# Altium PCB PCB1.PcbDoc
Units mm, origin at the board's own origin, x right, y up, seen from the top; angles counter-clockwise.
Board outline 55.37 x 70.1 mm, 2 copper layers (Top Layer, Bottom Layer); 201 components, 102 nets, 606 pads, 206 vias.
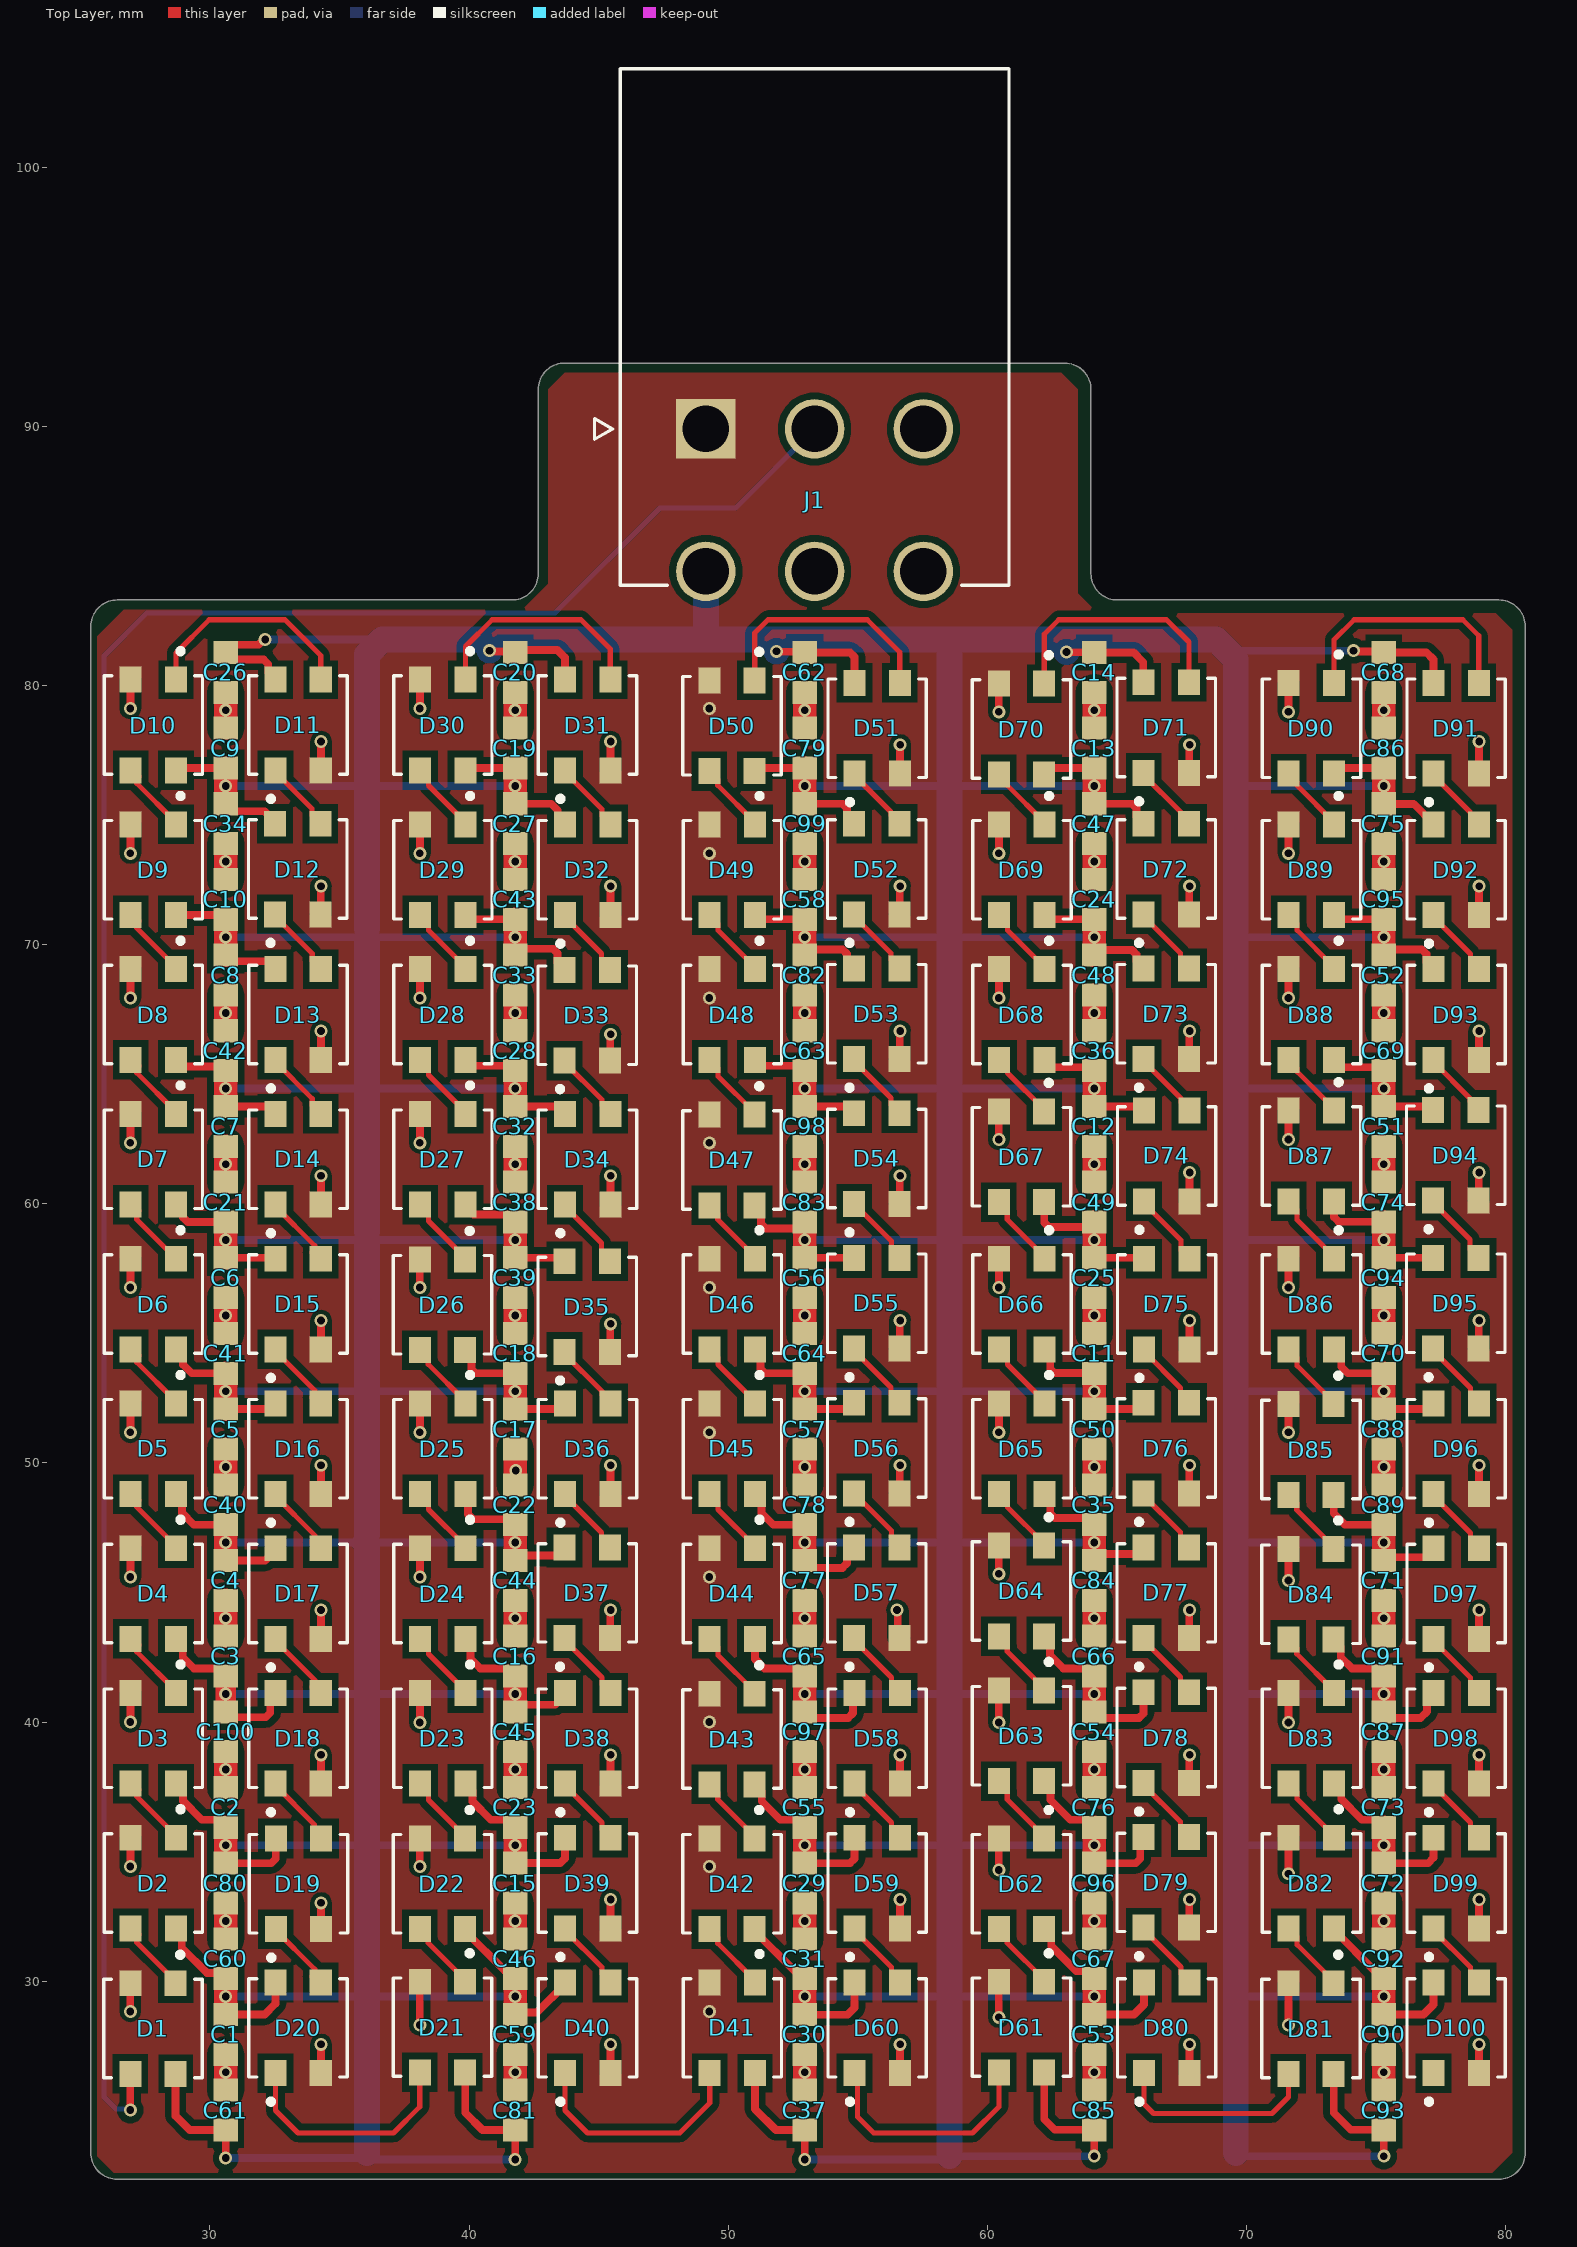
[diagram p0: Top Layer view]
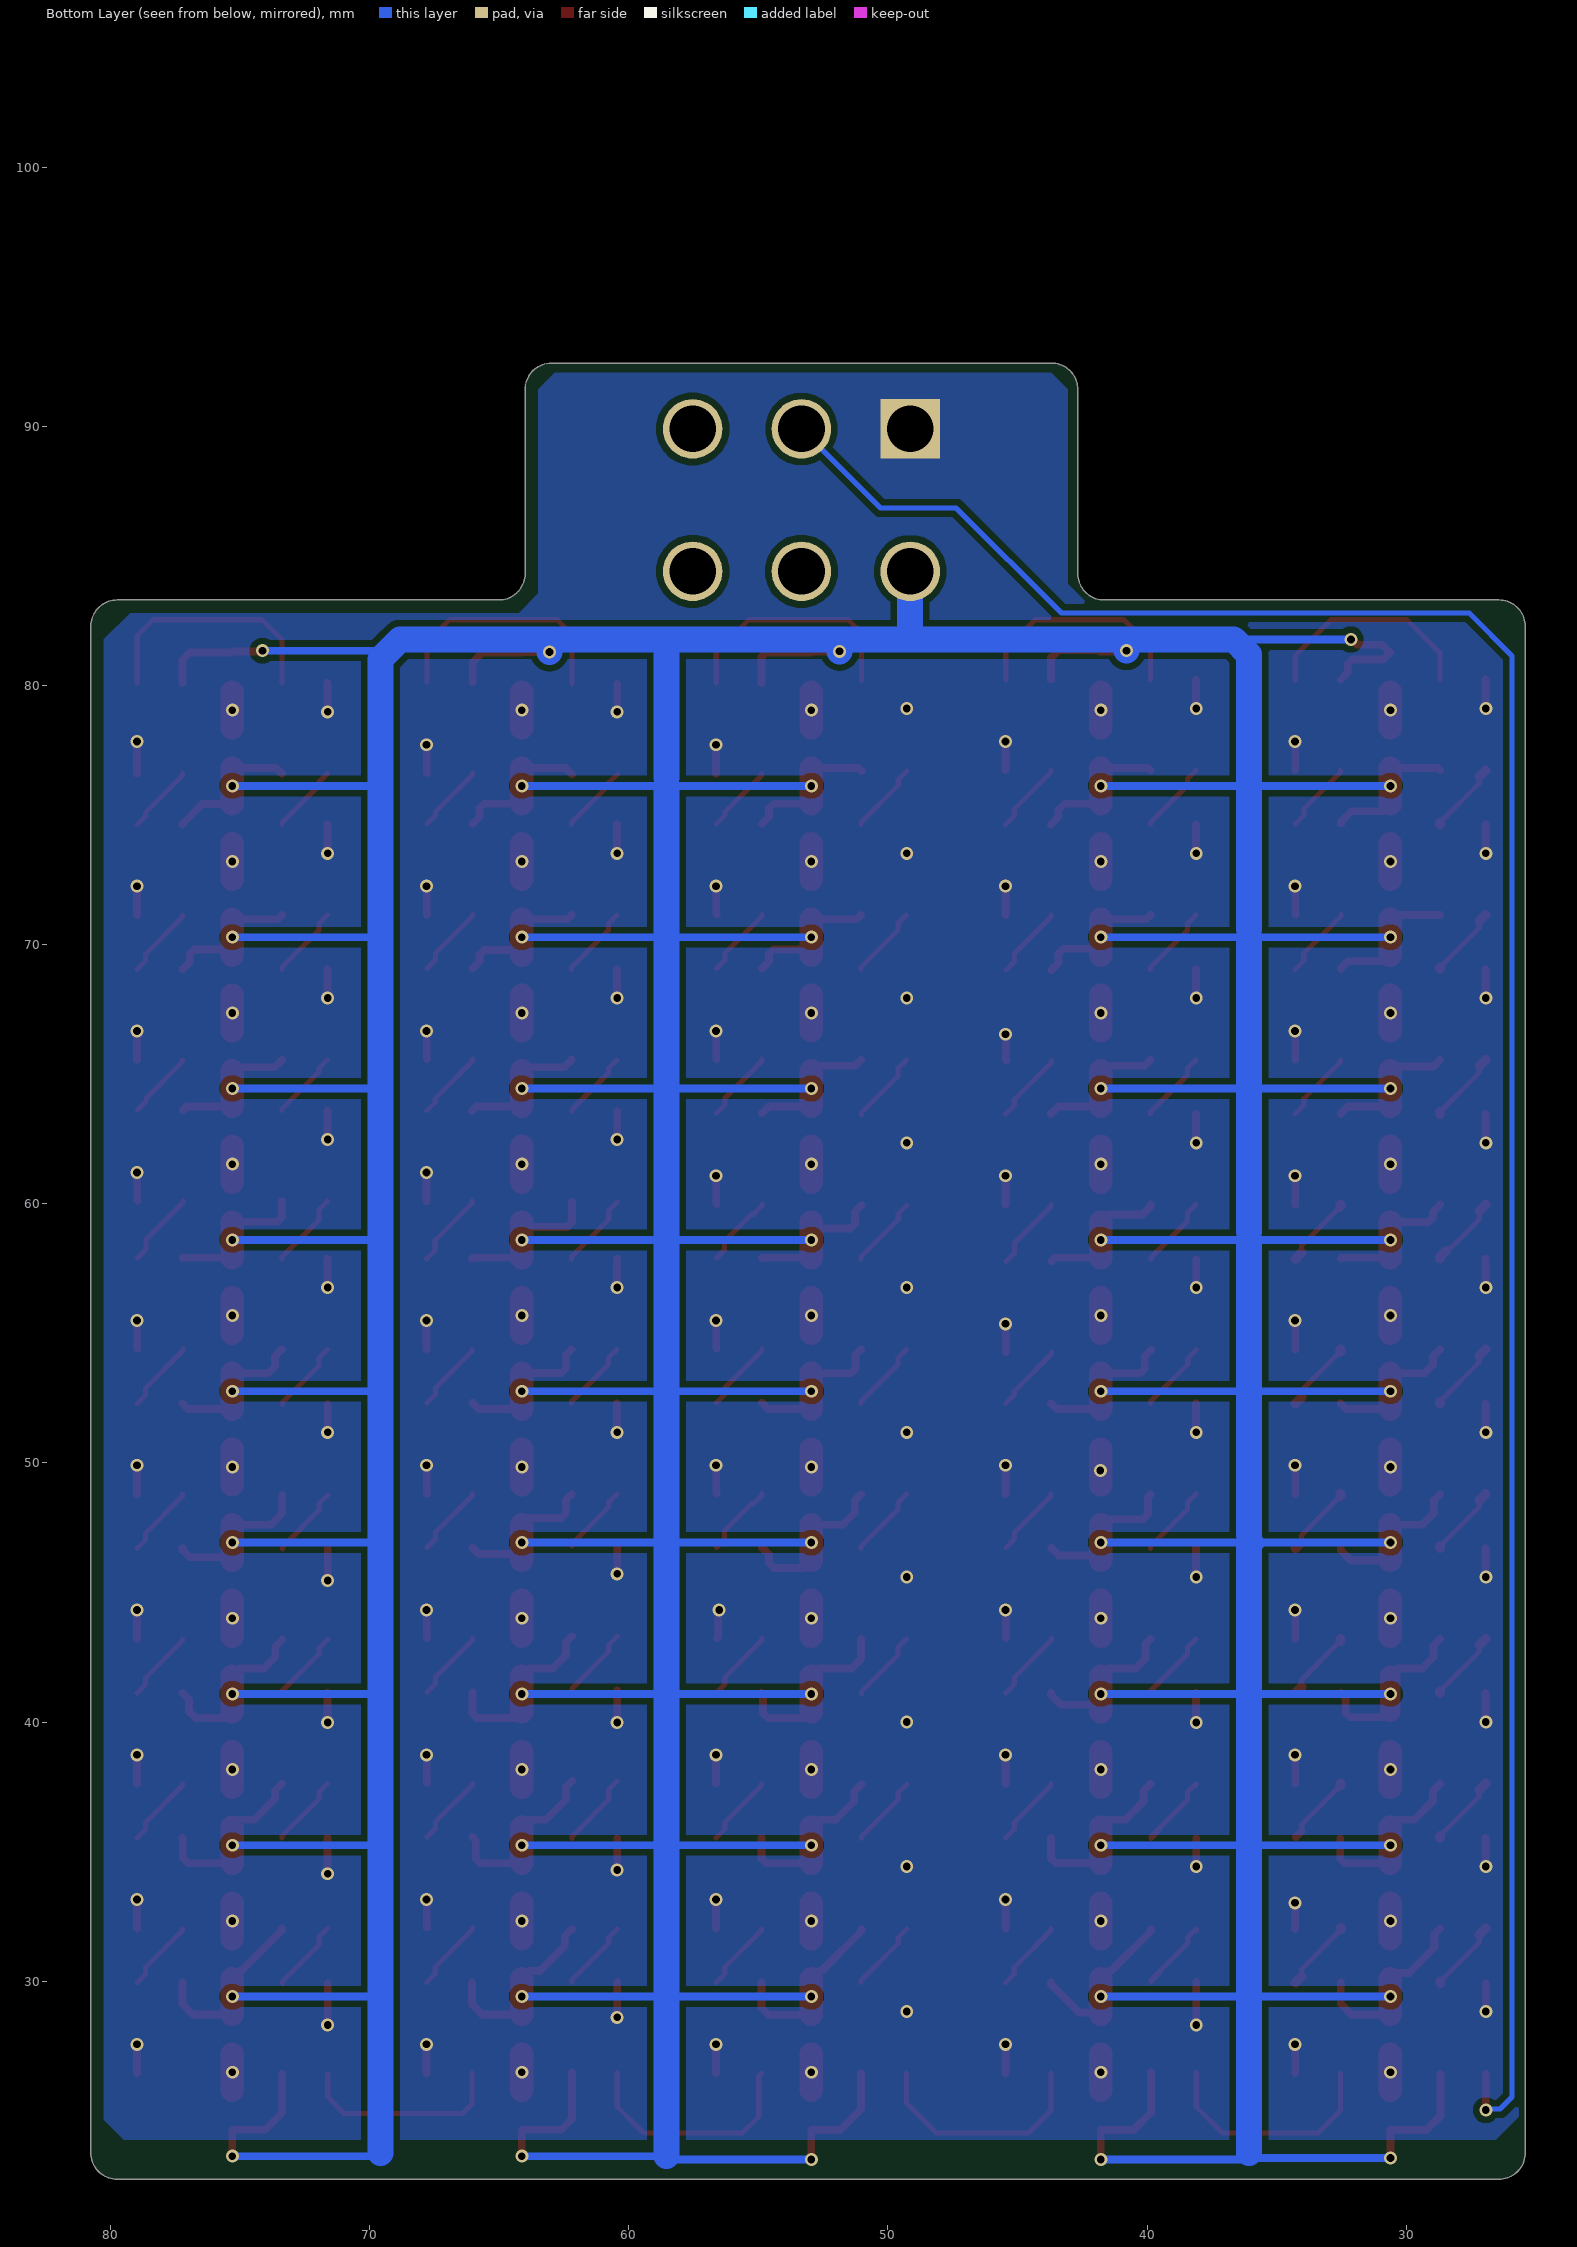
[diagram p1: Bottom Layer view, seen from below]
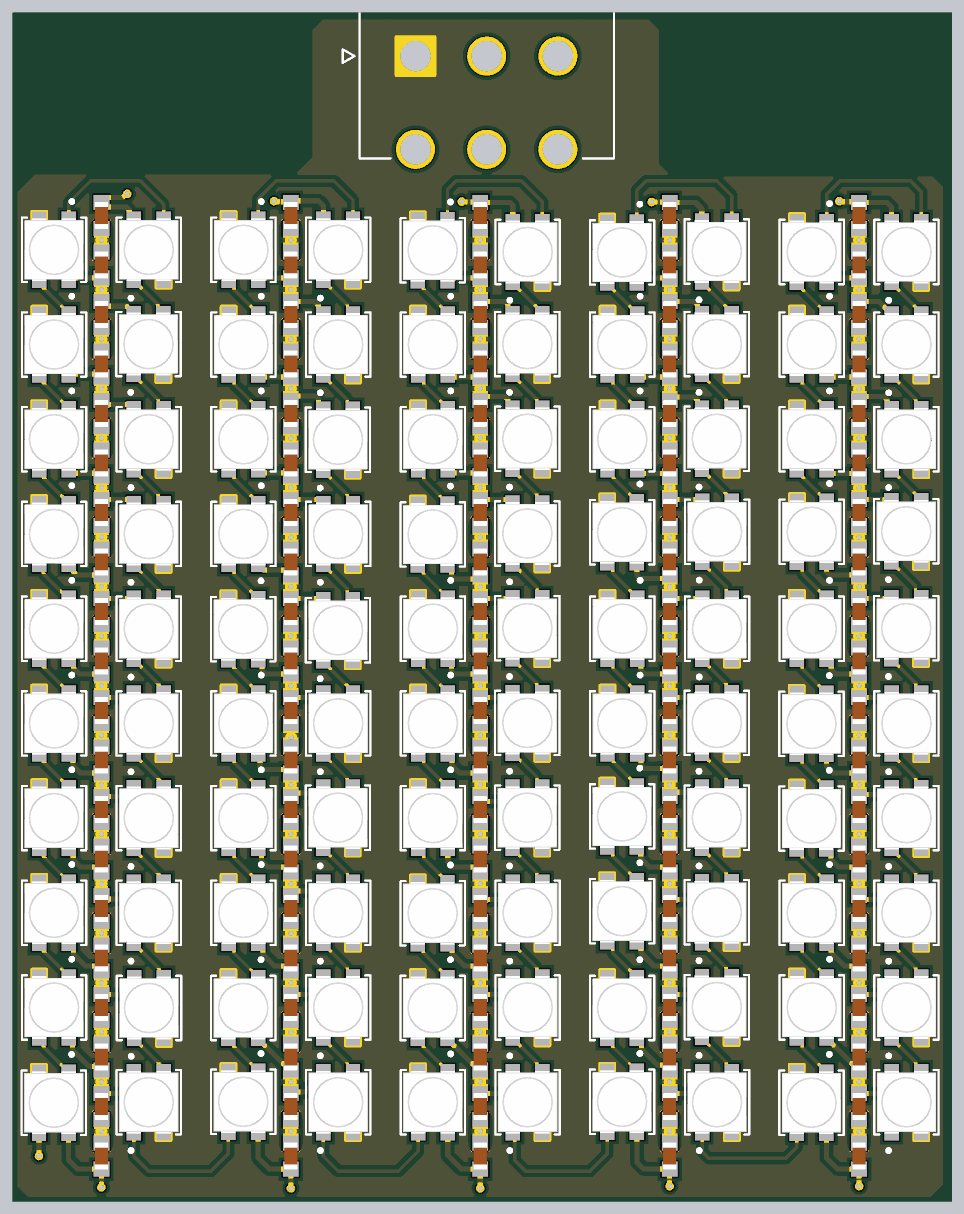
[diagram p2: 3D render of the assembled board from above, using the file's embedded part models]

## Layer stack, top to bottom
Top Solder: solder mask 0.0102, Solder Resist, Dk 3.5
Top Layer: signal copper 0.0356
Dielectric 1: dielectric 0.32, FR-4, Dk 4.8
Bottom Layer: signal copper 0.0356
Bottom Solder: solder mask 0.0102, Solder Resist, Dk 3.5

## Board outline
79.756,83.312 65.024,83.312 cw(c65.024,84.328) 64.008,84.328 64.008,91.44 ccw(c62.992,91.44) 62.992,92.456 43.688,92.456 ccw(c43.688,91.44) 42.672,91.44 42.672,84.328 cw(c41.656,84.328) 41.656,83.312 26.416,83.312 ccw(c26.416,82.296) 25.4,82.296 25.4,23.368 ccw(c26.416,23.368) 26.416,22.352 79.756,22.352 ccw(c79.756,23.368) 80.772,23.368 80.772,82.296 ccw(c79.756,82.296)

## Design rules (kind name [scope] priority, off if disabled: settings)
Clearance [All] p1: gap=0.254 ignorepadtopadclearanceinfootprint=TRUE except(0.127: SMDPad-SMDPad; 0.2: Arc-THPad Track-THPad; 0.5: Arc-Hole Track-Hole)
PolygonConnect [All] p1: connectstyle=Direct reliefconductorwidth=0.254 reliefentries=4 polygonreliefangle="90 Angle" airgapwidth=0.254
RoutingVias [All] p1: holewidth=0.711 width=1.27 viastyle="Through Hole" minholewidth=0.3 minwidth=0.25 maxholewidth=0.711 maxwidth=1.27
SolderMaskExpansion [All] p1: expansion=0.102 istentingtop=FALSE
UnRoutedNet [All] p1: checkbadconnections=TRUE
Width [All] p1: maxlimit=1 minlimit=0.127 preferedwidth=0.2
29 further rules are at their usual default settings.

## Components (designator, comment, footprint, x,y, rotation, side; value= is the part's Value field where it differs from the comment)
C1 "CL10B104KB8NNNC" CAPC1608X90N 30.607,27.94 r270 top
C2 "CL10B104KB8NNNC" CAPC1608X90N 30.607,36.703 r90 top
C3 "CL10B104KB8NNNC" CAPC1608X90N 30.607,42.545 r90 top
C4 "CL10B104KB8NNNC" CAPC1608X90N 30.607,45.466 r270 top
C5 "CL10B104KB8NNNC" CAPC1608X90N 30.607,51.308 r270 top
C6 "CL10B104KB8NNNC" CAPC1608X90N 30.607,57.15 r270 top
C7 "CL10B104KB8NNNC" CAPC1608X90N 30.607,62.992 r270 top
C8 "CL10B104KB8NNNC" CAPC1608X90N 30.607,68.834 r270 top
C9 "CL10B104KB8NNNC" CAPC1608X90N 30.607,77.597 r90 top
C10 "CL10B104KB8NNNC" CAPC1608X90N 30.607,71.755 r90 top
C11 "CL10B104KB8NNNC" CAPC1608X90N 64.135,54.229 r90 top
C12 "CL10B104KB8NNNC" CAPC1608X90N 64.135,62.992 r270 top
C13 "CL10B104KB8NNNC" CAPC1608X90N 64.135,77.597 r90 top
C14 "CL10B104KB8NNNC" CAPC1608X90N 64.135,80.518 r270 top
C15 "CL10B104KB8NNNC" CAPC1608X90N 41.783,33.782 r270 top
C16 "CL10B104KB8NNNC" CAPC1608X90N 41.783,42.545 r90 top
C17 "CL10B104KB8NNNC" CAPC1608X90N 41.783,51.308 r270 top
C18 "CL10B104KB8NNNC" CAPC1608X90N 41.783,54.229 r90 top
C19 "CL10B104KB8NNNC" CAPC1608X90N 41.783,77.597 r90 top
C20 "CL10B104KB8NNNC" CAPC1608X90N 41.783,80.518 r270 top
C21 "CL10B104KB8NNNC" CAPC1608X90N 30.607,60.071 r90 top
C22 "CL10B104KB8NNNC" CAPC1608X90N 41.783,48.387 r90 top
C23 "CL10B104KB8NNNC" CAPC1608X90N 41.783,36.703 r90 top
C24 "CL10B104KB8NNNC" CAPC1608X90N 64.135,71.755 r90 top
C25 "CL10B104KB8NNNC" CAPC1608X90N 64.135,57.15 r270 top
C26 "CL10B104KB8NNNC" CAPC1608X90N 30.607,80.518 r270 top
C27 "CL10B104KB8NNNC" CAPC1608X90N 41.783,74.676 r270 top
C28 "CL10B104KB8NNNC" CAPC1608X90N 41.783,65.913 r90 top
C29 "CL10B104KB8NNNC" CAPC1608X90N 52.959,33.782 r270 top
C30 "CL10B104KB8NNNC" CAPC1608X90N 52.959,27.94 r270 top
C31 "CL10B104KB8NNNC" CAPC1608X90N 52.959,30.861 r90 top
C32 "CL10B104KB8NNNC" CAPC1608X90N 41.783,62.992 r270 top
C33 "CL10B104KB8NNNC" CAPC1608X90N 41.783,68.834 r270 top
C34 "CL10B104KB8NNNC" CAPC1608X90N 30.607,74.676 r270 top
C35 "CL10B104KB8NNNC" CAPC1608X90N 64.135,48.387 r90 top
C36 "CL10B104KB8NNNC" CAPC1608X90N 64.135,65.913 r90 top
C37 "CL10B104KB8NNNC" CAPC1608X90N 52.959,25.019 r90 top
C38 "CL10B104KB8NNNC" CAPC1608X90N 41.783,60.071 r90 top
C39 "CL10B104KB8NNNC" CAPC1608X90N 41.783,57.15 r270 top
C40 "CL10B104KB8NNNC" CAPC1608X90N 30.607,48.387 r90 top
C41 "CL10B104KB8NNNC" CAPC1608X90N 30.607,54.229 r90 top
C42 "CL10B104KB8NNNC" CAPC1608X90N 30.607,65.913 r90 top
C43 "CL10B104KB8NNNC" CAPC1608X90N 41.783,71.755 r90 top
C44 "CL10B104KB8NNNC" CAPC1608X90N 41.783,45.466 r270 top
C45 "CL10B104KB8NNNC" CAPC1608X90N 41.783,39.624 r270 top
C46 "CL10B104KB8NNNC" CAPC1608X90N 41.783,30.861 r90 top
C47 "CL10B104KB8NNNC" CAPC1608X90N 64.135,74.676 r270 top
C48 "CL10B104KB8NNNC" CAPC1608X90N 64.135,68.834 r270 top
C49 "CL10B104KB8NNNC" CAPC1608X90N 64.135,60.071 r90 top
C50 "CL10B104KB8NNNC" CAPC1608X90N 64.135,51.308 r270 top
C51 "CL10B104KB8NNNC" CAPC1608X90N 75.311,62.992 r270 top
C52 "CL10B104KB8NNNC" CAPC1608X90N 75.311,68.834 r270 top
C53 "CL10B104KB8NNNC" CAPC1608X90N 64.135,27.94 r270 top
C54 "CL10B104KB8NNNC" CAPC1608X90N 64.135,39.624 r270 top
C55 "CL10B104KB8NNNC" CAPC1608X90N 52.959,36.703 r90 top
C56 "CL10B104KB8NNNC" CAPC1608X90N 52.959,57.15 r270 top
C57 "CL10B104KB8NNNC" CAPC1608X90N 52.959,51.308 r270 top
C58 "CL10B104KB8NNNC" CAPC1608X90N 52.959,71.755 r90 top
C59 "CL10B104KB8NNNC" CAPC1608X90N 41.783,27.94 r270 top
C60 "CL10B104KB8NNNC" CAPC1608X90N 30.607,30.861 r90 top
C61 "CL10B104KB8NNNC" CAPC1608X90N 30.607,25.019 r90 top
C62 "CL10B104KB8NNNC" CAPC1608X90N 52.959,80.518 r270 top
C63 "CL10B104KB8NNNC" CAPC1608X90N 52.959,65.913 r90 top
C64 "CL10B104KB8NNNC" CAPC1608X90N 52.959,54.229 r90 top
C65 "CL10B104KB8NNNC" CAPC1608X90N 52.959,42.545 r90 top
C66 "CL10B104KB8NNNC" CAPC1608X90N 64.135,42.545 r90 top
C67 "CL10B104KB8NNNC" CAPC1608X90N 64.135,30.861 r90 top
C68 "CL10B104KB8NNNC" CAPC1608X90N 75.311,80.518 r270 top
C69 "CL10B104KB8NNNC" CAPC1608X90N 75.311,65.913 r90 top
C70 "CL10B104KB8NNNC" CAPC1608X90N 75.311,54.229 r90 top
C71 "CL10B104KB8NNNC" CAPC1608X90N 75.311,45.466 r270 top
C72 "CL10B104KB8NNNC" CAPC1608X90N 75.311,33.782 r270 top
C73 "CL10B104KB8NNNC" CAPC1608X90N 75.311,36.703 r90 top
C74 "CL10B104KB8NNNC" CAPC1608X90N 75.311,60.071 r90 top
C75 "CL10B104KB8NNNC" CAPC1608X90N 75.311,74.676 r270 top
C76 "CL10B104KB8NNNC" CAPC1608X90N 64.135,36.703 r90 top
C77 "CL10B104KB8NNNC" CAPC1608X90N 52.959,45.466 r270 top
C78 "CL10B104KB8NNNC" CAPC1608X90N 52.959,48.387 r90 top
C79 "CL10B104KB8NNNC" CAPC1608X90N 52.959,77.597 r90 top
C80 "CL10B104KB8NNNC" CAPC1608X90N 30.607,33.782 r270 top
C81 "CL10B104KB8NNNC" CAPC1608X90N 41.783,25.019 r90 top
C82 "CL10B104KB8NNNC" CAPC1608X90N 52.959,68.834 r270 top
C83 "CL10B104KB8NNNC" CAPC1608X90N 52.959,60.071 r90 top
C84 "CL10B104KB8NNNC" CAPC1608X90N 64.135,45.466 r270 top
C85 "CL10B104KB8NNNC" CAPC1608X90N 64.135,25.019 r90 top
C86 "CL10B104KB8NNNC" CAPC1608X90N 75.311,77.597 r90 top
C87 "CL10B104KB8NNNC" CAPC1608X90N 75.311,39.624 r270 top
C88 "CL10B104KB8NNNC" CAPC1608X90N 75.311,51.308 r270 top
C89 "CL10B104KB8NNNC" CAPC1608X90N 75.311,48.387 r90 top
C90 "CL10B104KB8NNNC" CAPC1608X90N 75.311,27.94 r270 top
C91 "CL10B104KB8NNNC" CAPC1608X90N 75.311,42.545 r90 top
C92 "CL10B104KB8NNNC" CAPC1608X90N 75.311,30.861 r90 top
C93 "CL10B104KB8NNNC" CAPC1608X90N 75.311,25.019 r90 top
C94 "CL10B104KB8NNNC" CAPC1608X90N 75.311,57.15 r270 top
C95 "CL10B104KB8NNNC" CAPC1608X90N 75.311,71.755 r90 top
C96 "CL10B104KB8NNNC" CAPC1608X90N 64.135,33.782 r270 top
C97 "CL10B104KB8NNNC" CAPC1608X90N 52.959,39.624 r270 top
C98 "CL10B104KB8NNNC" CAPC1608X90N 52.959,62.992 r270 top
C99 "CL10B104KB8NNNC" CAPC1608X90N 52.959,74.676 r270 top
C100 "CL10B104KB8NNNC" CAPC1608X90N 30.607,39.624 r270 top
D1 "2659" 2659 27.799,28.166 r270 top
D2 "2659" 2659 27.813,33.782 r270 top
D3 "2659" 2659 27.813,39.37 r270 top
D4 "2659" 2659 27.813,44.958 r270 top
D5 "2659" 2659 27.813,50.546 r270 top
D6 "2659" 2659 27.813,56.134 r270 top
D7 "2659" 2659 27.813,61.722 r270 top
D8 "2659" 2659 27.813,67.31 r270 top
D9 "2659" 2659 27.813,72.898 r270 top
D10 "2659" 2659 27.813,78.486 r270 top
D11 "2659" 2659 33.401,78.486 r90 top
D12 "2659" 2659 33.387,72.926 r90 top
D13 "2659" 2659 33.401,67.31 r90 top
D14 "2659" 2659 33.401,61.722 r90 top
D15 "2659" 2659 33.401,56.134 r90 top
D16 "2659" 2659 33.401,50.546 r90 top
D17 "2659" 2659 33.401,44.958 r90 top
D18 "2659" 2659 33.401,39.37 r90 top
D19 "2659" 2659 33.415,33.754 r90 top
D20 "2659" 2659 33.401,28.194 r90 top
D21 "2659" 2659 38.975,28.222 r270 top
D22 "2659" 2659 38.975,33.754 r270 top
D23 "2659" 2659 38.989,39.37 r270 top
D24 "2659" 2659 38.989,44.958 r270 top
D25 "2659" 2659 38.989,50.546 r270 top
D26 "2659" 2659 38.975,56.106 r270 top
D27 "2659" 2659 38.989,61.722 r270 top
D28 "2659" 2659 38.989,67.31 r270 top
D29 "2659" 2659 38.989,72.898 r270 top
D30 "2659" 2659 38.989,78.486 r270 top
D31 "2659" 2659 44.577,78.486 r90 top
D32 "2659" 2659 44.577,72.898 r90 top
D33 "2659" 2659 44.563,67.282 r90 top
D34 "2659" 2659 44.577,61.722 r90 top
D35 "2659" 2659 44.563,56.035 r90 top
D36 "2659" 2659 44.577,50.546 r90 top
D37 "2659" 2659 44.563,44.986 r90 top
D38 "2659" 2659 44.577,39.37 r90 top
D39 "2659" 2659 44.577,33.782 r90 top
D40 "2659" 2659 44.577,28.194 r90 top
D41 "2659" 2659 50.165,28.194 r270 top
D42 "2659" 2659 50.151,33.754 r270 top
D43 "2659" 2659 50.151,39.342 r270 top
D44 "2659" 2659 50.165,44.958 r270 top
D45 "2659" 2659 50.165,50.546 r270 top
D46 "2659" 2659 50.165,56.134 r270 top
D47 "2659" 2659 50.151,61.694 r270 top
D48 "2659" 2659 50.165,67.31 r270 top
D49 "2659" 2659 50.165,72.898 r270 top
D50 "2659" 2659 50.151,78.458 r270 top
D51 "2659" 2659 55.753,78.359 r90 top
D52 "2659" 2659 55.739,72.926 r90 top
D53 "2659" 2659 55.739,67.338 r90 top
D54 "2659" 2659 55.739,61.75 r90 top
D55 "2659" 2659 55.739,56.162 r90 top
D56 "2659" 2659 55.739,50.574 r90 top
D57 "2659" 2659 55.739,44.986 r90 top
D58 "2659" 2659 55.753,39.37 r90 top
D59 "2659" 2659 55.753,33.782 r90 top
D60 "2659" 2659 55.753,28.194 r90 top
D61 "2659" 2659 61.327,28.222 r270 top
D62 "2659" 2659 61.327,33.754 r270 top
D63 "2659" 2659 61.327,39.469 r270 top
D64 "2659" 2659 61.327,45.057 r270 top
D65 "2659" 2659 61.341,50.546 r270 top
D66 "2659" 2659 61.341,56.134 r270 top
D67 "2659" 2659 61.327,61.821 r270 top
D68 "2659" 2659 61.341,67.31 r270 top
D69 "2659" 2659 61.341,72.898 r270 top
D70 "2659" 2659 61.327,78.331 r270 top
D71 "2659" 2659 66.915,78.387 r90 top
D72 "2659" 2659 66.915,72.926 r90 top
D73 "2659" 2659 66.915,67.338 r90 top
D74 "2659" 2659 66.929,61.849 r90 top
D75 "2659" 2659 66.929,56.134 r90 top
D76 "2659" 2659 66.915,50.574 r90 top
D77 "2659" 2659 66.915,44.986 r90 top
D78 "2659" 2659 66.915,39.398 r90 top
D79 "2659" 2659 66.915,33.81 r90 top
D80 "2659" 2659 66.929,28.194 r90 top
D81 "2659" 2659 72.503,28.166 r270 top
D82 "2659" 2659 72.517,33.782 r270 top
D83 "2659" 2659 72.517,39.37 r270 top
D84 "2659" 2659 72.503,44.93 r270 top
D85 "2659" 2659 72.503,50.518 r270 top
D86 "2659" 2659 72.517,56.134 r270 top
D87 "2659" 2659 72.517,61.849 r270 top
D88 "2659" 2659 72.517,67.31 r270 top
D89 "2659" 2659 72.517,72.898 r270 top
D90 "2659" 2659 72.517,78.359 r270 top
D91 "2659" 2659 78.105,78.359 r90 top
D92 "2659" 2659 78.105,72.898 r90 top
D93 "2659" 2659 78.105,67.31 r90 top
D94 "2659" 2659 78.091,61.877 r90 top
D95 "2659" 2659 78.091,56.162 r90 top
D96 "2659" 2659 78.105,50.546 r90 top
D97 "2659" 2659 78.105,44.958 r90 top
D98 "2659" 2659 78.105,39.37 r90 top
D99 "2659" 2659 78.105,33.782 r90 top
D100 "2659" 2659 78.105,28.194 r90 top
J1 "874270602" MOLEX_874270602 49.14,89.916 r180 top

## Footprints (in the part's own frame and the unit in brackets; to place one, negate y for a bottom-side part, rotate by r counter-clockwise, add the part's x,y. Pads: shape width x height; smd on the part's side, far side on the other; paste and mask are expansions set on the pad)
2659 [mm]
  rect 1x0.85 smd: 1(-1.75,0.875) 2(-1.75,-0.875) 3(1.75,-0.875) 4(1.75,0.875)
  silkscreen extent -2.95,-1.9 1.9,1.9, body extent -1.85,-1.75 1.85,1.75, height 1.1
CAPC1608X90N [mm]
  rect 0.89x0.93 smd: 1(-0.77,0) 2(0.77,0)
  body extent -0.8,-0.4 0.8,0.4, height 0.45
MOLEX_874270602 [mm]
  rect 2.3x2.3 / inner round 2.3 / far side rect 2.3x2.3 hole 1.8 mask+0.076: 1(0,0)
  round 2.3 hole 1.8 mask+0.076: 2(-4.2,0) 3(-8.4,0) 4(0,5.5) 5(-4.2,5.5) 6(-8.4,5.5)
  silkscreen extent -11.7,-13.9 4.3,6.04

## Part data
C1 C2 C3 C4 C5 C6 C7 C8 C9 C10 C11 C12 C13 C14 C15 C16 C17 C18 C19 C20 C21 C22 C23 C24 C25 C26 C27 C28 C29 C30 C31 C32 C33 C34 C35 C36 C37 C38 C39 C40 C41 C42 C43 C44 C45 C46 C47 C48 C49 C50 C51 C52 C53 C54 C55 C56 C57 C58 C59 C60 C61 C62 C63 C64 C65 C66 C67 C68 C69 C70 C71 C72 C73 C74 C75 C76 C77 C78 C79 C80 C81 C82 C83 C84 C85 C86 C87 C88 C89 C90 C91 C92 C93 C94 C95 C96 C97 C98 C99 C100: Package=None, Availability=Unavailable, MF="{'manufacturer': u'Samsung Electro-Mechanics'}", MP=CL10B104KB8NNNC, Price=None
D1 D2 D3 D4 D5 D6 D7 D8 D9 D10 D11 D12 D13 D14 D15 D16 D17 D18 D19 D20 D21 D22 D23 D24 D25 D26 D27 D28 D29 D30 D31 D32 D33 D34 D35 D36 D37 D38 D39 D40 D41 D42 D43 D44 D45 D46 D47 D48 D49 D50 D51 D52 D53 D54 D55 D56 D57 D58 D59 D60 D61 D62 D63 D64 D65 D66 D67 D68 D69 D70 D71 D72 D73 D74 D75 D76 D77 D78 D79 D80 D81 D82 D83 D84 D85 D86 D87 D88 D89 D90 D91 D92 D93 D94 D95 D96 D97 D98 D99 D100: library part CMP-011-000000-2, "20 AWG Hook-Up Wire 26/34 White 300V 40.00' _12.19m_", Package="TQFP-32 Adafruit Industries", Component Type=Standard, Design Item ID=2659, Digi-Key_Part_Number=2183-2659-ND, Digi-Key_Purchase_URL=https://www.digikey.com/product-detail/en/pololu-corporation/2659/2183-2659-ND/10451102?utm_source=snapeda&utm_medium=aggregator&utm_campaign=symbol, MF="Adafruit Industries", MP=2659, Pin Count=4, SnapEDA_Link=https://www.snapeda.com/parts/2659/Adafruit%20Industries%20LLC/view-part/548522/?ref=snap, Source=SnapEDAsch.SchLib
J1: library part CMP-002-00072-1, Case/Package=None, Availability=Unavailable, Component Type=Standard, Design Item ID=874270602, MP=874270602, Pins=6, Price=None, Source=874270602.SchLib

## Via types
v1: diameter 0.5, hole 0.3, Top Layer to Bottom Layer, 206 vias

## Nets (pads, with @x,y where several pads share a name; then routed paths per layer and width w, separated by ;. In a path a pad name is that pad's centre, name@x,y a point inside that pad or via, vN(x,y) a via of type N, cw(c..) or ccw(c..) an arc to the next point about the centre after c; other vN are vias at no path point)
+5: C1.1 C2.1 C3.1 C4.1 C5.1 C6.1 C7.1 C8.1 C9.1 C10.1 C11.1 C12.1 C13.1 C14.1 C15.1 C16.1 C17.1 C18.1 C19.1 C20.1 C21.1 C22.1 C23.1 C24.1 C25.1 C26.1 C27.1 C28.1 C29.1 C30.1 C31.1 C32.1 C33.1 C34.1 C35.1 C36.1 C37.1 C38.1 C39.1 C40.1 C41.1 C42.1 C43.1 C44.1 C45.1 C46.1 C47.1 C48.1 C49.1 C50.1 C51.1 C52.1 C53.1 C54.1 C55.1 C56.1 C57.1 C58.1 C59.1 C60.1 C61.1 C62.1 C63.1 C64.1 C65.1 C66.1 C67.1 C68.1 C69.1 C70.1 C71.1 C72.1 C73.1 C74.1 C75.1 C76.1 C77.1 C78.1 C79.1 C80.1 C81.1 C82.1 C83.1 C84.1 C85.1 C86.1 C87.1 C88.1 C89.1 C90.1 C91.1 C92.1 C93.1 C94.1 C95.1 C96.1 C97.1 C98.1 C99.1 C100.1 D1.4 D2.4 D3.4 D4.4 D5.4 D6.4 D7.4 D8.4 D9.4 D10.4 D11.4 D12.4 D13.4 D14.4 D15.4 D16.4 D17.4 D18.4 D19.4 D20.4 D21.4 D22.4 D23.4 D24.4 D25.4 D26.4 D27.4 D28.4 D29.4 D30.4 D31.4 D32.4 D33.4 D34.4 D35.4 D36.4 D37.4 D38.4 D39.4 D40.4 D41.4 D42.4 D43.4 D44.4 D45.4 D46.4 D47.4 D48.4 D49.4 D50.4 D51.4 D52.4 D53.4 D54.4 D55.4 D56.4 D57.4 D58.4 D59.4 D60.4 D61.4 D62.4 D63.4 D64.4 D65.4 D66.4 D67.4 D68.4 D69.4 D70.4 D71.4 D72.4 D73.4 D74.4 D75.4 D76.4 D77.4 D78.4 D79.4 D80.4 D81.4 D82.4 D83.4 D84.4 D85.4 D86.4 D87.4 D88.4 D89.4 D90.4 D91.4 D92.4 D93.4 D94.4 D95.4 D96.4 D97.4 D98.4 D99.4 D100.4 J1.4 | length 826.8
  Top Layer w0.3: D1.4 28.674,24.793 29.218,24.249 C61.1 v1(30.607,23.165) ; D2.4 28.908,31.812 28.908,31.29 29.884,30.314 30.384,30.314 C60.1 ; D3.4 28.963,37.345 28.963,36.95 29.685,36.228 30.312,36.228 C2.1 ; D4.4 28.946,42.95 28.946,42.504 29.38,42.07 30.312,42.07 C3.1 ; D5.4 28.92,48.564 28.92,48.067 29.37,47.617 C40.1 ; D6.4 28.963,54.109 28.963,53.79 29.294,53.459 C41.1@30.587,53.459 ; D7.4 28.963,59.697 28.963,59.477 29.139,59.301 C21.1 ; D8.4 28.945,65.303 30.447,65.303 C42.1 ; D9.4 30.444,71.148 C10.1 ; D10.4 28.779,76.827 C9.1 ; C1.1 32.114,28.71 32.526,29.122 D20.4 ; C80.1 32.364,34.552 32.54,34.728 D19.4 ; C100.1 30.818,40.183 32.15,40.183 32.326,40.359 32.326,40.92 D18.4 ; C4.1 32.129,46.236 32.526,46.633 D17.4 ; C5.1 32.308,52.078 D16.4 ; C6.1 32.49,57.92 D15.4 ; C7.1 32.251,63.762 32.526,63.487 D14.4 ; C8.1 30.844,69.367 32.251,69.367 32.526,69.092 D13.4 ; C34.1 30.894,75.159 32.104,75.159 32.512,74.751 D12.4 ; v1(32.131,81.788) 32.077,81.788 31.874,81.585 31.098,81.585 31.096,81.583 30.922,81.583 30.627,81.288 C26.1 30.885,81.01 32.075,81.01 32.251,80.835 32.251,80.511 D11.4 ; D21.4 39.85,24.92 40.521,24.249 C81.1 v1(41.783,23.114) ; D22.4 39.85,31.929 41.393,30.386 41.488,30.386 C46.1 ; D26.4 40.09,54.116 40.09,53.635 40.266,53.459 C18.1 ; D23.4 40.134,37.35 40.134,36.929 40.836,36.228 41.488,36.228 C23.1 ; D24.4 40.058,43.014 40.058,42.441 40.429,42.07 41.488,42.07 C16.1 ; D25.4 39.964,48.696 39.964,48.022 40.157,47.828 41.572,47.828 C22.1 ; D27.4 39.864,59.897 40.173,59.588 41.496,59.588 C38.1 ; D28.4 40.095,65.329 41.597,65.329 C28.1 ; D29.4 40.027,70.985 C43.1 ; D30.4 39.955,76.827 C19.1 ; v1(40.792,81.356) 40.826,81.322 41.817,81.322 41.877,81.382 43.409,81.382 43.702,81.088 D31.4 ; C59.1 41.864,28.791 42.624,28.791 43.702,29.869 D40.4 ; C45.1 42.054,40.665 43.322,40.665 43.702,41.045 D38.4 ; C44.1 41.978,46.431 43.413,46.431 43.688,46.706 D37.4 ; C17.1 43.484,52.078 D36.4 ; C39.1 43.553,57.92 D35.4 ; C32.1 43.427,63.762 43.702,63.487 D34.4 ; C33.1 42.029,69.85 43.237,69.85 43.413,69.674 43.413,69.307 D33.4 ; C27.1 43.172,75.446 43.427,75.191 43.427,74.923 D32.4 ; C15.1@41.788,34.557 43.523,34.557 43.702,34.736 D39.4 ; D42.4 51.026,31.929 52.569,30.386 52.664,30.386 C31.1 ; D43.4 51.301,37.317 51.301,36.939 52.012,36.228 52.664,36.228 C55.1 ; D47.4 51.274,59.696 51.274,59.231 51.45,59.055 52.713,59.055 C83.1 ; D50.4 51.145,76.827 C79.1 ; D41.4 51.04,25.058 51.849,24.249 C37.1 v1(52.959,23.114) ; D44.4 51.04,42.432 51.402,42.07 52.664,42.07 C65.1 ; D45.4 51.285,48.551 51.285,48.08 51.748,47.617 C78.1 ; D46.4 51.252,54.172 51.252,53.635 51.428,53.459 C64.1 ; D48.4 51.271,65.329 52.773,65.329 C63.1 ; D49.4 51.203,70.985 C58.1 ; v1(51.867,81.331) 51.888,81.309 52.938,81.309 C62.1 54.702,81.288 54.878,81.112 D51.4 ; C30.1 52.967,28.702 54.61,28.702 54.878,28.97 D60.4 ; C29.1 52.967,34.544 54.702,34.544 54.878,34.72 D59.4 ; C97.1 53.196,40.157 54.635,40.157 54.824,40.346 54.824,41.066 D58.4 ; C77.1 53.246,45.949 54.413,45.949 54.589,46.124 54.589,46.461 D57.4 ; C57.1 54.618,52.078 D56.4 ; C56.1 54.856,57.92 D55.4 ; C98.1 54.602,63.762 D54.4 ; C82.1 53.18,69.825 54.413,69.825 54.589,69.649 54.589,69.363 D53.4 ; C99.1 54.413,75.446 54.589,75.27 54.589,74.951 D52.4 ; D61.4 62.202,24.666 62.611,24.257 64.127,24.257 C85.1 v1(64.135,23.241) ; D62.4 62.477,31.729 62.477,31.351 63.442,30.386 63.84,30.386 C67.1 ; D63.4 62.443,37.478 62.443,36.998 63.213,36.228 63.84,36.228 C76.1 ; D64.4 62.43,43.079 62.43,42.574 62.934,42.07 63.84,42.07 C66.1 ; D67.4 62.202,59.282 62.378,59.106 63.94,59.106 C49.1 ; D70.4 62.448,76.827 C13.1 ; D65.4 62.436,48.576 62.436,48.055 62.612,47.879 63.873,47.879 C35.1 ; D66.4 62.436,54.164 62.436,53.643 62.612,53.467 64.127,53.467 C11.1 ; D68.4 62.216,65.553 62.491,65.278 64,65.278 C36.1 ; D69.4 62.379,70.985 C24.1 ; v1(63.068,81.305) 63.077,81.297 64.126,81.297 C14.1 65.651,81.288 66.028,80.911 66.028,80.149 D71.4 ; C53.1 65.667,28.71 66.054,29.097 D80.4 ; C96.1 65.737,34.552 65.913,34.728 65.913,35.433 D79.4 ; C54.1 64.372,40.157 65.864,40.157 66.04,40.333 D78.4 ; C84.1 64.381,46.482 65.786,46.482 D77.4 ; C50.1 65.794,52.078 D76.4 ; C25.1 66.018,57.92 D75.4 ; C12.1 65.891,63.762 D74.4 ; C48.1 64.33,69.799 65.589,69.799 65.765,69.623 65.765,69.363 D73.4 ; C47.1 65.589,75.446 65.765,75.27 65.765,74.951 D72.4 ; D81.4 73.378,24.92 74.041,24.257 75.303,24.257 C93.1 v1(75.311,23.241) ; D84.4 73.653,42.905 73.653,42.501 74.084,42.07 75.016,42.07 C91.1 ; D85.4 73.378,48.055 73.816,47.617 C89.1 ; D82.4 73.392,31.957 74.963,30.386 75.016,30.386 C92.1 ; D83.4 73.667,37.345 73.667,37.026 74.465,36.228 75.016,36.228 C73.1 ; D86.4 73.667,54.109 73.667,53.714 73.922,53.459 C70.1 ; D87.4 73.392,59.485 73.568,59.309 75.303,59.309 C74.1 ; D88.4 73.392,65.553 73.667,65.278 75.176,65.278 C69.1 ; D89.4 73.555,70.985 C95.1 ; D90.4 73.61,76.827 C86.1 ; v1(74.143,81.356) 74.177,81.322 75.277,81.322 C68.1 76.954,81.288 77.23,81.012 D91.4 ; C90.1 76.843,28.71 77.23,29.097 D100.4 ; C72.1 77.021,34.552 77.227,34.758 77.227,35.529 D99.4 ; C87.1 75.548,40.157 76.733,40.157 76.982,40.406 76.982,40.872 D98.4 ; C71.1 75.433,46.358 76.955,46.358 77.23,46.633 D97.4 ; C88.1 77.012,52.078 D96.4 ; C94.1 77.208,57.92 D95.4 ; C51.1 77.081,63.762 D94.4 ; C52.1 75.532,69.825 76.779,69.825 76.955,69.649 76.955,69.335 D93.4 ; C75.1@75.316,75.441 76.462,75.441 77.23,74.673 D92.4
  Top Layer w0.8: C100.1 v1(30.607,41.084) C3.1
  Top Layer w0.9: C1.1 v1(30.607,29.4) C60.1 ; C80.1 v1(30.607,35.242) C2.1 ; C4.1 v1(30.607,46.926) C40.1 ; C5.1 v1(30.607,52.768) C41.1 ; C6.1 v1(30.607,58.61) C21.1 ; C7.1 v1(30.607,64.453) C42.1 ; C8.1 v1(30.607,70.294) C10.1 ; C34.1 v1(30.607,76.136) C9.1 ; C59.1 v1(41.783,29.4) C46.1 ; C23.1 v1(41.783,35.242) C15.1 C15.1@41.788,34.557 ; C45.1 v1(41.783,41.084) C16.1 ; C44.1 v1(41.783,46.926) C22.1 ; C17.1 v1(41.783,52.768) C18.1 ; C39.1 v1(41.783,58.61) C38.1 ; C32.1 v1(41.783,64.453) C28.1 ; C33.1 v1(41.783,70.294) C43.1 ; C27.1 v1(41.783,76.136) C19.1 ; C30.1 v1(52.959,29.4) C31.1 ; C29.1 v1(52.959,35.242) C55.1 ; C97.1 v1(52.959,41.084) C65.1 ; C77.1 v1(52.959,46.926) C78.1 ; C57.1 v1(52.959,52.768) C64.1 ; C56.1 v1(52.959,58.61) C83.1 ; C98.1 v1(52.959,64.453) C63.1 ; C82.1 v1(52.959,70.294) C58.1 ; C99.1 v1(52.959,76.136) C79.1 ; C53.1 v1(64.135,29.4) C67.1 ; C96.1 v1(64.135,35.242) C76.1 ; C54.1 v1(64.135,41.084) C66.1 ; C84.1 v1(64.135,46.926) C35.1 ; C50.1 v1(64.135,52.768) C11.1 ; C25.1 v1(64.135,58.61) C49.1 ; C12.1 v1(64.135,64.453) C36.1 ; C48.1 v1(64.135,70.294) C24.1 ; C47.1 v1(64.135,76.136) C13.1 ; C90.1 v1(75.311,29.4) C92.1 ; C72.1 v1(75.311,35.242) C73.1 ; C87.1 v1(75.311,41.084) C91.1 ; C71.1 v1(75.311,46.926) C89.1 ; C88.1 v1(75.311,52.768) C70.1 ; C94.1 v1(75.311,58.61) C74.1 ; C51.1 v1(75.311,64.453) C69.1 ; C52.1 v1(75.311,70.294) C95.1 ; C86.1 v1(75.311,76.136) C75.1 C75.1@75.316,75.441
  Bottom Layer w0.3: v1(30.607,23.165) 35.865,23.165 36.068,23.368 36.322,23.114 v1(41.783,23.114) ; v1(30.607,29.4) 36.005,29.4 ; v1(30.607,35.242) 35.877,35.242 ; v1(30.607,41.084) 36.005,41.084 ; v1(30.607,46.926) 35.75,46.926 ; v1(30.607,52.768) 36.005,52.768 ; v1(30.607,58.61) 36.068,58.61 v1(41.783,58.61) ; v1(30.607,64.453) 36.005,64.453 ; v1(30.607,70.294) 36.068,70.294 v1(41.783,70.294) ; v1(30.607,76.136) 36.005,76.136 ; v1(32.131,81.788) 36.654,81.788 ; 36.068,35.242 v1(41.783,35.242) ; 36.068,41.084 v1(41.783,41.084) ; 36.068,46.926 v1(41.783,46.926) ; 36.068,52.768 v1(41.783,52.768) ; 36.068,64.453 v1(41.783,64.453) ; 36.068,76.136 v1(41.783,76.136) ; 36.131,29.4 v1(41.783,29.4) ; v1(52.959,23.114) 58.42,23.114 58.547,23.241 v1(64.135,23.241) ; v1(52.959,29.4) 58.547,29.4 v1(64.135,29.4) ; v1(52.959,35.242) 58.102,35.242 ; v1(52.959,41.084) 58.229,41.084 58.547,41.402 58.864,41.084 v1(64.135,41.084) ; v1(52.959,46.926) 58.483,46.926 ; v1(52.959,52.768) 58.483,52.768 ; v1(52.959,58.61) 58.483,58.61 ; v1(52.959,64.453) 58.483,64.453 ; v1(52.959,70.294) 58.547,70.294 ; v1(52.959,76.136) 58.547,76.136 v1(64.135,76.136) ; 58.547,35.687 58.102,35.242 ; 58.61,46.926 v1(64.135,46.926) ; 58.61,52.768 v1(64.135,52.768) ; 58.61,58.61 v1(64.135,58.61) ; 58.61,64.453 v1(64.135,64.453) ; 58.737,70.294 v1(64.135,70.294) ; v1(64.135,35.242) 58.102,35.242 ; 69.215,81.407 69.266,81.356 v1(74.143,81.356) ; 69.596,23.368 69.723,23.241 v1(75.311,23.241) ; 69.596,35.052 69.787,35.242 v1(75.311,35.242) ; 69.596,41.402 69.913,41.084 v1(75.311,41.084) ; 69.596,64.77 69.913,64.453 v1(75.311,64.453) ; 69.596,70.485 69.787,70.294 v1(75.311,70.294) ; 69.659,29.4 v1(75.311,29.4) ; 69.659,46.926 v1(75.311,46.926) ; 69.659,52.768 v1(75.311,52.768) ; 69.659,58.61 v1(75.311,58.61) ; 69.659,76.136 v1(75.311,76.136)
  Bottom Layer w0.6: 35.75,46.926 36.068,46.926
  Bottom Layer w0.9: 36.005,29.4 36.068,29.464 36.131,29.4 ; 58.483,46.926 58.547,46.99 58.61,46.926 ; 58.483,52.768 58.547,52.832 58.61,52.768 ; 58.483,58.61 58.547,58.674 58.61,58.61 ; 58.483,64.453 58.547,64.516 58.61,64.453 ; 69.596,29.464 69.659,29.4 ; 69.596,46.99 69.659,46.926 ; 69.596,52.832 69.659,52.768 ; 69.596,58.674 69.659,58.61 ; 69.596,76.2 69.659,76.136
  Bottom Layer w1: 36.068,23.368 36.068,29.464 36.068,35.052 ; 36.068,35.242 36.068,41.084 ; 36.068,41.148 36.068,46.926 ; 36.068,47.244 36.068,52.768 ; 36.068,52.832 36.068,58.61 ; 36.068,58.928 36.068,64.453 ; 36.068,64.516 36.068,70.294 ; 36.068,70.612 36.068,76.136 ; 36.068,76.2 36.068,81.202 36.654,81.788 40.64,81.788 ; v1(40.792,81.356) 40.792,81.788 49.149,81.788 ; J1.4 49.149,84.407 49.149,81.788 ; 51.816,81.788 49.149,81.788 ; v1(51.867,81.331) 51.867,81.788 58.547,81.788 ; 58.547,23.241 58.547,29.4 58.547,41.402 58.547,46.99 58.547,52.832 58.547,58.674 58.547,64.516 58.547,70.104 ; 58.547,70.294 58.547,76.136 ; 58.547,76.454 58.547,81.788 ; v1(63.068,81.305) 63.068,81.712 62.992,81.788 58.547,81.788 ; 63.068,81.788 68.834,81.788 69.215,81.407 ; 69.266,81.356 69.596,81.026 69.596,76.2 69.596,70.485 69.596,64.77 69.596,58.674 69.596,52.832 69.596,46.99 69.596,41.402 69.596,35.052 69.596,29.464 69.596,23.368
GND: C1.2 C2.2 C3.2 C4.2 C5.2 C6.2 C7.2 C8.2 C9.2 C10.2 C11.2 C12.2 C13.2 C14.2 C15.2 C16.2 C17.2 C18.2 C19.2 C20.2 C21.2 C22.2 C23.2 C24.2 C25.2 C26.2 C27.2 C28.2 C29.2 C30.2 C31.2 C32.2 C33.2 C34.2 C35.2 C36.2 C37.2 C38.2 C39.2 C40.2 C41.2 C42.2 C43.2 C44.2 C45.2 C46.2 C47.2 C48.2 C49.2 C50.2 C51.2 C52.2 C53.2 C54.2 C55.2 C56.2 C57.2 C58.2 C59.2 C60.2 C61.2 C62.2 C63.2 C64.2 C65.2 C66.2 C67.2 C68.2 C69.2 C70.2 C71.2 C72.2 C73.2 C74.2 C75.2 C76.2 C77.2 C78.2 C79.2 C80.2 C81.2 C82.2 C83.2 C84.2 C85.2 C86.2 C87.2 C88.2 C89.2 C90.2 C91.2 C92.2 C93.2 C94.2 C95.2 C96.2 C97.2 C98.2 C99.2 C100.2 D1.2 D2.2 D3.2 D4.2 D5.2 D6.2 D7.2 D8.2 D9.2 D10.2 D11.2 D12.2 D13.2 D14.2 D15.2 D16.2 D17.2 D18.2 D19.2 D20.2 D21.2 D22.2 D23.2 D24.2 D25.2 D26.2 D27.2 D28.2 D29.2 D30.2 D31.2 D32.2 D33.2 D34.2 D35.2 D36.2 D37.2 D38.2 D39.2 D40.2 D41.2 D42.2 D43.2 D44.2 D45.2 D46.2 D47.2 D48.2 D49.2 D50.2 D51.2 D52.2 D53.2 D54.2 D55.2 D56.2 D57.2 D58.2 D59.2 D60.2 D61.2 D62.2 D63.2 D64.2 D65.2 D66.2 D67.2 D68.2 D69.2 D70.2 D71.2 D72.2 D73.2 D74.2 D75.2 D76.2 D77.2 D78.2 D79.2 D80.2 D81.2 D82.2 D83.2 D84.2 D85.2 D86.2 D87.2 D88.2 D89.2 D90.2 D91.2 D92.2 D93.2 D94.2 D95.2 D96.2 D97.2 D98.2 D99.2 D100.2 J1.1 | length 171.2
  Top Layer w0.3: v1(26.924,28.829) D1.2 ; v1(26.924,34.417) 26.931,34.424 26.931,35.525 D2.2 ; v1(26.924,40.005) 26.931,40.012 26.931,41.113 D3.2 ; v1(26.924,45.593) 26.931,45.6 26.931,46.701 D4.2 ; v1(26.924,51.181) 26.931,51.188 26.931,52.289 D5.2 ; v1(26.924,56.769) 26.931,56.776 26.931,57.877 D6.2 ; v1(26.924,62.357) 26.931,62.364 26.931,63.465 D7.2 ; v1(26.924,67.945) 26.931,67.952 26.931,69.053 D8.2 ; v1(26.924,73.533) 26.931,73.54 26.931,74.641 D9.2 ; v1(26.924,79.121) 26.931,79.128 26.931,80.243 D10.2 ; D12.2 34.276,71.19 34.276,72.249 v1(34.29,72.263) ; D20.2 34.283,26.451 34.283,27.552 v1(34.29,27.559) ; D18.2 34.283,37.627 34.283,38.728 v1(34.29,38.735) ; D17.2 34.283,43.215 34.283,44.316 v1(34.29,44.323) ; D16.2 34.283,48.803 34.283,49.904 v1(34.29,49.911) ; D15.2 34.283,54.391 34.283,55.492 v1(34.29,55.499) ; D14.2 34.283,59.979 34.283,61.08 v1(34.29,61.087) ; D13.2 34.283,65.567 34.283,66.668 v1(34.29,66.675) ; D11.2 34.283,76.743 34.283,77.844 v1(34.29,77.851) ; D19.2 v1(34.29,33.02) ; v1(38.1,28.3) D21.2 ; v1(38.1,34.417) D22.2 ; v1(38.1,39.984) 38.107,39.991 38.107,41.113 D23.2 ; v1(38.1,45.593) 38.107,45.6 38.107,46.701 D24.2 ; v1(38.1,51.181) 38.107,51.188 38.107,52.289 D25.2 ; v1(38.1,56.769) D26.2 ; v1(38.1,62.357) 38.107,62.364 38.107,63.465 D27.2 ; v1(38.1,67.945) 38.107,67.952 38.107,69.053 D28.2 ; v1(38.1,73.533) 38.107,73.54 38.107,74.641 D29.2 ; v1(38.1,79.121) 38.107,79.128 38.107,80.229 D30.2 ; D37.2 45.452,43.25 45.452,44.309 v1(45.466,44.323) ; D35.2 45.452,54.299 45.452,55.358 v1(45.466,55.372) ; D33.2 45.452,65.546 45.452,66.534 v1(45.466,66.548) ; D40.2 45.459,26.451 45.459,27.552 v1(45.466,27.559) ; D39.2 45.459,32.039 45.459,33.14 v1(45.466,33.147) ; D38.2 45.459,37.627 45.459,38.728 v1(45.466,38.735) ; D36.2 45.459,48.803 45.459,49.904 v1(45.466,49.911) ; D34.2 45.459,59.979 45.459,61.08 v1(45.466,61.087) ; D32.2 45.459,71.155 45.459,72.256 v1(45.466,72.263) ; D31.2 45.459,76.743 45.459,77.844 v1(45.466,77.851) ; v1(56.515,44.323) 56.553,44.285 56.553,43.297 D57.2 ; D56.2 56.628,48.838 56.628,49.897 v1(56.642,49.911) ; D55.2 56.628,54.426 56.628,55.485 v1(56.642,55.499) ; D54.2 56.628,60.014 56.628,61.073 v1(56.642,61.087) ; D53.2 56.628,65.602 56.628,66.661 v1(56.642,66.675) ; D52.2 56.628,71.19 56.628,72.249 v1(56.642,72.263) ; D60.2 56.635,26.451 56.635,27.552 v1(56.642,27.559) ; D59.2 56.635,32.039 56.635,33.14 v1(56.642,33.147) ; D58.2 56.635,37.627 56.635,38.728 v1(56.642,38.735) ; D51.2 56.635,76.616 56.635,77.717 v1(56.642,77.724) ; v1(60.452,28.601) D61.2 ; v1(60.452,34.29) D62.2 ; v1(60.452,39.984) D63.2 ; v1(60.452,45.72) D64.2 ; v1(60.452,51.181) 60.459,51.188 60.459,52.289 D65.2 ; v1(60.452,56.769) 60.459,56.776 60.459,57.877 D66.2 ; v1(60.452,62.484) D67.2 ; v1(60.452,67.945) 60.459,67.952 60.459,69.053 D68.2 ; v1(60.452,73.533) 60.459,73.54 60.459,74.641 D69.2 ; v1(60.452,78.994) D70.2 ; D79.2 67.804,32.074 67.804,33.133 v1(67.818,33.147) ; D78.2 67.804,37.662 67.804,38.721 v1(67.818,38.735) ; D77.2 67.804,43.25 67.804,44.309 v1(67.818,44.323) ; D76.2 67.804,48.838 67.804,49.897 v1(67.818,49.911) ; D73.2 67.804,65.602 67.804,66.661 v1(67.818,66.675) ; D72.2 67.804,71.19 67.804,72.249 v1(67.818,72.263) ; D71.2 67.804,76.651 67.804,77.71 v1(67.818,77.724) ; D80.2 67.811,26.451 67.811,27.552 v1(67.818,27.559) ; D75.2 67.811,54.391 67.811,55.492 v1(67.818,55.499) ; D74.2 67.811,60.106 67.811,61.207 v1(67.818,61.214) ; v1(71.628,28.3) D81.2 ; v1(71.628,34.142) 71.635,34.149 71.635,35.525 D82.2 ; v1(71.628,39.984) 71.635,39.991 71.635,41.113 D83.2 ; v1(71.628,45.466) D84.2 ; v1(71.628,51.181) D85.2 ; v1(71.628,56.769) 71.635,56.776 71.635,57.877 D86.2 ; v1(71.628,62.484) 71.635,62.491 71.635,63.592 D87.2 ; v1(71.628,67.945) 71.635,67.952 71.635,69.053 D88.2 ; v1(71.628,73.533) 71.635,73.54 71.635,74.641 D89.2 ; v1(71.628,78.994) 71.635,79.001 71.635,80.102 D90.2 ; D95.2 78.98,54.426 78.98,55.485 v1(78.994,55.499) ; D94.2 78.98,60.141 78.98,61.2 v1(78.994,61.214) ; D100.2 78.987,26.451 78.987,27.552 v1(78.994,27.559) ; D99.2 78.987,32.039 78.987,33.14 v1(78.994,33.147) ; D98.2 78.987,37.627 78.987,38.728 v1(78.994,38.735) ; D97.2 78.987,43.215 78.987,44.316 v1(78.994,44.323) ; D96.2 78.987,48.803 78.987,49.904 v1(78.994,49.911) ; D93.2 78.987,65.567 78.987,66.668 v1(78.994,66.675) ; D92.2 78.987,71.155 78.987,72.256 v1(78.994,72.263) ; D91.2 78.987,76.616 78.987,77.844 v1(78.994,77.851)
  Top Layer w0.9: C61.2 C1.2 ; C60.2 C80.2 ; C2.2 C100.2 ; C3.2 C4.2 ; C40.2 C5.2 ; C41.2 C6.2 ; C21.2 C7.2 ; C42.2 C8.2 ; C10.2 C34.2 C34.2@30.617,73.906 ; C9.2 C26.2 ; C81.2 C59.2 ; C46.2 C15.2 ; C23.2 C45.2 ; C16.2 C44.2 ; C22.2 C17.2 ; C18.2 C39.2 ; C38.2 C32.2 ; C28.2 C33.2 ; C43.2 C27.2 ; C19.2 C20.2 ; C37.2 C30.2 ; C31.2 C29.2 ; C55.2 C97.2 ; C65.2 C77.2 ; C78.2 C57.2 ; C64.2 C56.2 ; C83.2 C98.2 ; C63.2 C82.2 ; C58.2 C99.2 ; C79.2 C62.2 ; C85.2 C53.2 ; C67.2 C96.2 ; C76.2 C54.2 ; C66.2 C84.2 ; C35.2 C50.2 ; C11.2 C25.2 ; C49.2 C12.2 ; C36.2 C48.2 ; C24.2 C47.2 ; C13.2 C14.2 ; C93.2 C90.2 ; C92.2 C72.2 ; C73.2 C87.2 ; C91.2 C71.2 ; C89.2 C88.2 ; C70.2 C94.2 ; C74.2 C51.2 ; C69.2 C52.2 ; C95.2 C75.2 ; C86.2 C68.2
  other v1: 30.607,26.479 41.783,26.479 52.959,26.479 64.135,26.479 75.311,26.479 49.276,28.829 30.607,32.322 41.783,32.322 52.959,32.322 64.135,32.322 75.311,32.322 49.276,34.417 30.607,38.163 41.783,38.163 52.959,38.163 64.135,38.163 75.311,38.163 49.276,40.005 30.607,44.005 41.783,44.005 52.959,44.005 64.135,44.005 75.311,44.005 49.276,45.593 41.804,49.708 30.607,49.847 52.959,49.847 64.135,49.847 75.311,49.847 49.276,51.181 30.607,55.689 41.783,55.689 52.959,55.689 64.135,55.689 75.311,55.689 49.276,56.769 30.607,61.531 41.783,61.531 52.959,61.531 64.135,61.531 75.311,61.531 49.276,62.357 30.607,67.373 41.783,67.373 52.959,67.373 64.135,67.373 75.311,67.373 49.276,67.945 30.607,73.215 41.783,73.215 52.959,73.215 64.135,73.215 75.311,73.215 49.276,73.533 30.607,79.057 41.783,79.057 52.959,79.057 64.135,79.057 75.311,79.057 49.276,79.121
NetD1_1: D1.1 D2.3 | length 2.8
  Top Layer w0.2: D2.3@27.173,31.798 27.173,31.492 D1.1@28.674,29.991
  Top Layer w0.381: D2.3 D2.3@27.173,31.798 ; D1.1 D1.1@28.674,29.991
NetD1_3: D1.3 J1.2 | length 89.3
  Top Layer w0.3: v1(26.924,25.019) D1.3
  Bottom Layer w0.2: v1@26.886,25.057 26.378,25.057 25.908,25.527 25.908,81.153 27.559,82.804 43.307,82.804 47.371,86.868 50.292,86.868 J1.2
  Bottom Layer w0.3: v1@26.886,25.057 v1(26.924,25.019)
NetD2_1: D2.1 D3.3 | length 2.8
  Top Layer w0.2: D3.3@27.173,37.386 27.173,37.122 D2.1@28.688,35.607
  Top Layer w0.381: D3.3 D3.3@27.173,37.386 ; D2.1 D2.1@28.688,35.607
NetD3_1: D3.1 D4.3 | length 2.8
  Top Layer w0.2: D4.3@27.173,42.974 27.173,42.71 D3.1@28.688,41.195
  Top Layer w0.381: D4.3 D4.3@27.173,42.974 ; D3.1 D3.1@28.688,41.195
NetD4_1: D4.1 D5.3 | length 2.8
  Top Layer w0.2: D5.3@27.173,48.562 27.173,48.298 D4.1@28.688,46.783
  Top Layer w0.381: D5.3 D5.3@27.173,48.562 ; D4.1 D4.1@28.688,46.783
NetD5_1: D5.1 D6.3 | length 2.8
  Top Layer w0.2: D6.3@27.173,54.15 27.173,53.886 D5.1@28.688,52.371
  Top Layer w0.381: D6.3 D6.3@27.173,54.15 ; D5.1 D5.1@28.688,52.371
NetD6_1: D6.1 D7.3 | length 2.9
  Top Layer w0.2: D7.3@27.173,59.738 27.173,59.399 28.378,58.194 D6.1@28.453,58.194
  Top Layer w0.381: D7.3 D7.3@27.173,59.738 ; D6.1@28.453,58.194 28.688,57.959 D6.1
NetD7_1: D7.1 D8.3 | length 2.8
  Top Layer w0.2: D8.3@27.173,65.326 27.173,65.062 D7.1@28.688,63.547
  Top Layer w0.381: D8.3 D8.3@27.173,65.326 ; D7.1 D7.1@28.688,63.547
NetD8_1: D8.1 D9.3 | length 2.8
  Top Layer w0.2: D9.3@27.173,70.914 27.173,70.65 D8.1@28.688,69.135
  Top Layer w0.381: D9.3 D9.3@27.173,70.914 ; D8.1 D8.1@28.688,69.135
NetD9_1: D9.1 D10.3 | length 2.8
  Top Layer w0.2: D10.3@27.173,76.502 27.173,76.238 D9.1@28.688,74.723
  Top Layer w0.381: D10.3 D10.3@27.173,76.502 ; D9.1 D9.1@28.688,74.723
NetD10_1: D10.1 D11.3 | length 8.7
  Top Layer w0.2: D10.1 28.688,81.266 29.972,82.55 32.893,82.55 34.276,81.167 D11.3
NetD11_1: D11.1 D12.3 | length 2.8
  Top Layer w0.2: D11.1 32.526,76.661 33.937,75.25 33.937,75.001 D12.3
NetD12_1: D12.1 D13.3 | length 2.8
  Top Layer w0.2: D12.1 32.512,71.101 33.951,69.662 33.951,69.385 D13.3
NetD13_1: D13.1 D14.3 | length 2.8
  Top Layer w0.2: D13.1 32.526,65.485 33.951,64.06 33.951,63.797 D14.3
NetD14_1: D14.1 D15.3 | length 2.8
  Top Layer w0.2: D14.1@32.526,59.897 34.041,58.382 D15.3@34.041,58.118
  Top Layer w0.381: D14.1@32.526,59.897 D14.1 ; D15.3@34.041,58.118 D15.3
NetD15_1: D15.1 D16.3 | length 2.8
  Top Layer w0.2: D15.1@32.526,54.309 34.041,52.794 D16.3@34.041,52.53
  Top Layer w0.381: D15.1@32.526,54.309 D15.1 ; D16.3@34.041,52.53 D16.3
NetD16_1: D16.1 D17.3 | length 2.8
  Top Layer w0.2: D16.1@32.526,48.721 34.041,47.206 D17.3@34.041,46.942
  Top Layer w0.381: D16.1@32.526,48.721 D16.1 ; D17.3@34.041,46.942 D17.3
NetD17_1: D17.1 D18.3 | length 2.8
  Top Layer w0.2: D17.1@32.526,43.133 34.041,41.618 D18.3@34.041,41.354
  Top Layer w0.381: D17.1@32.526,43.133 D17.1 ; D18.3@34.041,41.354 D18.3
NetD18_1: D18.1 D19.3 | length 2.8
  Top Layer w0.2: D18.1@32.526,37.545 34.027,36.044 D19.3@34.027,35.795
  Top Layer w0.3: D19.3@34.027,35.795 D19.3@34.262,35.56
  Top Layer w0.381: D18.1@32.526,37.545 D18.1
NetD19_1: D19.1 D20.3 | length 2.8
  Top Layer w0.2: D19.1@32.512,31.985 34.041,30.456 D20.3@34.041,30.178
  Top Layer w0.381: D19.1@32.512,31.985 D19.1@32.512,32.06 ; D20.3@34.041,30.178 D20.3
NetD20_1: D20.1 D21.3 | length 9.1
  Top Layer w0.2: D20.1 32.526,25.005 33.401,24.13 37.084,24.13 38.1,25.146 D21.3
NetD21_1: D21.1 D22.3 | length 3.3
  Top Layer w0.2: D22.3@38.1,31.929 D22.3 38.425,31.679 38.425,31.472 39.85,30.047 D21.1 D21.1@39.525,30.297
NetD22_1: D22.1 D23.3 | length 3.4
  Top Layer w0.2: D23.3@38.114,37.545 D23.3 38.439,37.295 38.439,36.99 39.85,35.579 D22.1 D22.1@39.525,35.829
NetD23_1: D23.1 D24.3 | length 2.8
  Top Layer w0.2: D24.3 38.439,42.883 38.439,42.62 39.864,41.195 D23.1
NetD24_1: D24.1 D25.3 | length 2.8
  Top Layer w0.2: D25.3 38.439,48.471 38.439,48.208 39.864,46.783 D24.1
NetD25_1: D25.1 D26.3 | length 2.8
  Top Layer w0.2: D26.3 38.425,54.031 38.425,53.81 39.864,52.371 D25.1
NetD26_1: D26.1 D27.3 | length 2.8
  Top Layer w0.2: D27.3 38.439,59.647 38.439,59.342 39.85,57.931 D26.1
NetD27_1: D27.1 D28.3 | length 2.8
  Top Layer w0.2: D28.3 38.439,65.235 38.439,64.972 39.864,63.547 D27.1
NetD28_1: D28.1 D29.3 | length 2.8
  Top Layer w0.2: D29.3 38.439,70.823 38.439,70.56 39.864,69.135 D28.1
NetD29_1: D29.1 D30.3 | length 2.8
  Top Layer w0.2: D30.3 38.439,76.411 38.439,76.148 39.864,74.723 D29.1
NetD30_1: D30.1 D31.3 | length 9
  Top Layer w0.2: D30.1 39.864,81.52 40.894,82.55 44.323,82.55 45.452,81.421 D31.3
NetD31_1: D31.1 D32.3 | length 2.8
  Top Layer w0.2: D31.1 43.702,76.661 45.127,75.236 45.127,74.973 D32.3
NetD32_1: D32.1 D33.3 | length 2.8
  Top Layer w0.2: D32.1 43.702,71.073 45.113,69.662 45.113,69.357 D33.3
NetD33_1: D33.1 D34.3 | length 2.8
  Top Layer w0.2: D33.1 43.688,65.457 45.127,64.018 45.127,63.797 D34.3
NetD34_1: D34.1 D35.3 | length 2.9
  Top Layer w0.2: D34.1 43.702,59.897 45.113,58.486 45.113,58.11 D35.3
NetD35_1: D35.1 D36.3 | length 2.7
  Top Layer w0.2: D35.1 43.688,54.21 45.127,52.771 45.127,52.621 D36.3
NetD36_1: D36.1 D37.3 | length 2.8
  Top Layer w0.2: D36.1 43.702,48.721 45.113,47.31 45.113,47.061 D37.3
NetD37_1: D37.1 D38.3 | length 2.8
  Top Layer w0.2: D37.1 43.688,43.161 45.127,41.722 45.127,41.445 D38.3
NetD38_1: D38.1 D39.3 | length 2.8
  Top Layer w0.2: D38.1 43.702,37.545 45.127,36.12 45.127,35.857 D39.3
NetD39_1: D39.1 D40.3 | length 2.8
  Top Layer w0.2: D39.1 43.702,31.957 45.127,30.532 45.127,30.269 D40.3
NetD40_1: D40.1 D41.3 | length 9
  Top Layer w0.2: D40.1 43.702,25.005 44.577,24.13 48.133,24.13 49.29,25.287 D41.3
NetD41_1: D41.1 D42.3 | length 2.8
  Top Layer w0.2: D42.3 49.601,31.679 49.601,31.458 51.04,30.019 D41.1
NetD42_1: D42.1 D43.3 | length 2.8
  Top Layer w0.2: D43.3 49.601,37.267 49.601,37.004 51.026,35.579 D42.1
NetD43_1: D43.1 D44.3 | length 2.8
  Top Layer w0.2: D44.3 49.615,42.883 49.615,42.578 51.026,41.167 D43.1
NetD44_1: D44.1 D45.3 | length 2.8
  Top Layer w0.2: D45.3 49.615,48.471 49.615,48.208 51.04,46.783 D44.1
NetD45_1: D45.1 D46.3 | length 2.8
  Top Layer w0.2: D46.3 49.615,54.059 49.615,53.796 51.04,52.371 D45.1
NetD46_1: D46.1 D47.3 | length 2.8
  Top Layer w0.2: D47.3 49.601,59.619 49.601,59.398 51.04,57.959 D46.1
NetD47_1: D47.1 D48.3 | length 2.8
  Top Layer w0.2: D48.3 49.615,65.235 49.615,64.93 51.026,63.519 D47.1
NetD48_1: D48.1 D49.3 | length 2.8
  Top Layer w0.2: D49.3 49.615,70.823 49.615,70.56 51.04,69.135 D48.1
NetD49_1: D49.1 D50.3 | length 2.8
  Top Layer w0.2: D50.3 49.601,76.383 49.601,76.162 51.04,74.723 D49.1
NetD50_1: D50.1 D51.3 | length 9.4
  Top Layer w0.2: D50.1 51.026,82.039 51.537,82.55 55.372,82.55 56.628,81.294 D51.3
NetD51_1: D51.1 D52.3 | length 2.7
  Top Layer w0.2: D51.1 54.878,76.534 56.289,75.123 56.289,75.001 D52.3
NetD52_1: D52.1 D53.3 | length 2.8
  Top Layer w0.2: D52.1 54.864,71.101 56.289,69.676 56.289,69.413 D53.3
NetD53_1: D53.1 D54.3 | length 2.8
  Top Layer w0.2: D53.1 54.864,65.513 56.289,64.088 56.289,63.825 D54.3
NetD54_1: D54.1 D55.3 | length 2.9
  Top Layer w0.2: D54.1 54.864,59.925 55.189,59.6 55.264,59.6 56.308,58.556 56.308,58.218 D55.3
NetD55_1: D55.1 D56.3 | length 2.8
  Top Layer w0.2: D55.1 54.864,54.337 56.289,52.912 56.289,52.649 D56.3
NetD56_1: D56.1 D57.3 | length 2.9
  Top Layer w0.2: D56.1 54.864,48.749 55.189,48.424 55.264,48.424 56.308,47.38 56.308,47.042 D57.3
NetD57_1: D57.1 D58.3 | length 2.8
  Top Layer w0.2: D57.1 54.864,43.161 56.303,41.722 56.303,41.445 D58.3
NetD58_1: D58.1 D59.3 | length 2.8
  Top Layer w0.2: D58.1 54.878,37.545 56.303,36.12 56.303,35.857 D59.3
NetD59_1: D59.1 D60.3 | length 2.8
  Top Layer w0.2: D59.1 54.878,31.957 56.303,30.532 56.303,30.269 D60.3
NetD60_1: D60.1 D61.3 | length 9.2
  Top Layer w0.2: D60.1 54.991,26.331 54.991,24.765 55.626,24.13 59.436,24.13 60.452,25.146 D61.3
NetD61_1: D61.1 D62.3 | length 2.8
  Top Layer w0.2: D62.3 60.777,31.679 60.777,31.472 62.202,30.047 D61.1
NetD62_1: D62.1 D63.3 | length 2.9
  Top Layer w0.2: D63.3 60.777,37.394 60.777,37.004 62.202,35.579 D62.1
NetD63_1: D63.1 D64.3 | length 2.8
  Top Layer w0.2: D64.3 60.777,42.982 60.777,42.719 62.202,41.294 D63.1
NetD64_1: D64.1 D65.3 | length 2.7
  Top Layer w0.2: D65.3 60.791,48.471 60.791,48.293 62.202,46.882 D64.1
NetD65_1: D65.1 D66.3 | length 2.8
  Top Layer w0.2: D66.3 60.791,54.059 60.791,53.796 62.216,52.371 D65.1
NetD66_1: D66.1 D67.3 | length 2.9
  Top Layer w0.2: D67.3 60.777,59.746 60.777,59.398 62.216,57.959 D66.1
NetD67_1: D67.1 D68.3 | length 2.7
  Top Layer w0.2: D68.3 60.791,65.235 60.791,65.057 62.202,63.646 D67.1
NetD68_1: D68.1 D69.3 | length 2.8
  Top Layer w0.2: D69.3 60.791,70.823 60.791,70.56 62.216,69.135 D68.1
NetD69_1: D69.1 D70.3 | length 2.7
  Top Layer w0.2: D70.3 60.777,76.256 60.777,76.162 62.216,74.723 D69.1
NetD70_1: D70.1 D71.3 | length 9.6
  Top Layer w0.2: D70.1 62.202,81.989 62.763,82.55 66.929,82.55 67.79,81.689 D71.3
NetD71_1: D71.1 D72.3 | length 2.7
  Top Layer w0.2: D71.1 66.04,76.562 67.465,75.137 67.465,75.001 D72.3
NetD72_1: D72.1 D73.3 | length 2.8
  Top Layer w0.2: D72.1 66.04,71.101 67.465,69.676 67.465,69.413 D73.3
NetD73_1: D73.1 D74.3 | length 2.7
  Top Layer w0.2: D73.1 66.04,65.513 67.479,64.074 67.479,63.924 D74.3
NetD74_1: D74.1 D75.3 | length 2.9
  Top Layer w0.2: D74.1 66.054,60.024 67.479,58.599 67.479,58.209 D75.3
NetD75_1: D75.1 D76.3 | length 2.8
  Top Layer w0.2: D75.1 66.054,54.309 67.465,52.898 67.465,52.649 D76.3
NetD76_1: D76.1 D77.3 | length 2.8
  Top Layer w0.2: D76.1 66.04,48.749 67.465,47.324 67.465,47.061 D77.3
NetD77_1: D77.1 D78.3 | length 2.8
  Top Layer w0.2: D77.1 66.04,43.161 67.465,41.736 67.465,41.473 D78.3
NetD78_1: D78.1 D79.3 | length 2.8
  Top Layer w0.2: D78.1 66.04,37.573 67.465,36.148 67.465,35.885 D79.3
NetD79_1: D79.1 D80.3 | length 2.8
  Top Layer w0.2: D79.1 66.04,31.985 67.479,30.546 67.479,30.269 D80.3
NetD80_1: D80.1 D81.3 | length 8.1
  Top Layer w0.2: D80.1 66.06,26.438 66.06,25.253 66.421,24.892 70.993,24.892 71.628,25.527 D81.3
NetD81_1: D81.1 D82.3 | length 2.8
  Top Layer w0.2: D82.3 71.967,31.707 71.967,31.402 73.378,29.991 D81.1
NetD82_1: D82.1 D83.3 | length 2.8
  Top Layer w0.2: D83.3 71.967,37.295 71.967,37.032 73.392,35.607 D82.1
NetD83_1: D83.1 D84.3 | length 2.8
  Top Layer w0.2: D84.3 71.953,42.855 71.953,42.634 73.392,41.195 D83.1
NetD84_1: D84.1 D85.3 | length 2.8
  Top Layer w0.2: D85.3 71.953,48.443 71.953,48.18 73.378,46.755 D84.1
NetD85_1: D85.1 D86.3 | length 2.8
  Top Layer w0.2: D86.3 71.967,54.059 71.967,53.754 73.378,52.343 D85.1
NetD86_1: D86.1 D87.3 | length 2.9
  Top Layer w0.2: D87.3 71.967,59.774 71.967,59.384 73.392,57.959 D86.1
NetD87_1: D87.1 D88.3 | length 2.7
  Top Layer w0.2: D88.3 71.967,65.235 71.967,65.099 73.392,63.674 D87.1
NetD88_1: D88.1 D89.3 | length 2.8
  Top Layer w0.2: D89.3 71.967,70.823 71.967,70.56 73.392,69.135 D88.1
NetD89_1: D89.1 D90.3 | length 2.7
  Top Layer w0.2: D90.3 71.967,76.284 71.967,76.148 73.392,74.723 D89.1
NetD90_1: D90.1 D91.3 | length 9.7
  Top Layer w0.2: D90.1 73.392,81.774 74.168,82.55 78.359,82.55 78.98,81.929 D91.3
NetD91_1: D91.1 D92.3 | length 2.7
  Top Layer w0.2: D91.1 77.23,76.534 78.655,75.109 78.655,74.973 D92.3
NetD92_1: D92.1 D93.3 | length 2.8
  Top Layer w0.2: D92.1 77.23,71.073 78.655,69.648 78.655,69.385 D93.3
NetD93_1: D93.1 D94.3 | length 2.7
  Top Layer w0.2: D93.1 77.23,65.485 78.641,64.074 78.641,63.952 D94.3
NetD94_1: D94.1 D95.3 | length 2.9
  Top Layer w0.2: D94.1 77.216,60.052 78.641,58.627 78.641,58.237 D95.3
NetD95_1: D95.1 D96.3 | length 2.8
  Top Layer w0.2: D95.1 77.216,54.337 78.655,52.898 78.655,52.621 D96.3
NetD96_1: D96.1 D97.3 | length 2.8
  Top Layer w0.2: D96.1 77.23,48.721 78.655,47.296 78.655,47.033 D97.3
NetD97_1: D97.1 D98.3 | length 2.8
  Top Layer w0.2: D97.1 77.23,43.133 78.655,41.708 78.655,41.445 D98.3
NetD98_1: D98.1 D99.3 | length 2.8
  Top Layer w0.2: D98.1 77.23,37.545 78.655,36.12 78.655,35.857 D99.3
NetD99_1: D99.1 D100.3 | length 2.8
  Top Layer w0.2: D99.1 77.23,31.957 78.655,30.532 78.655,30.269 D100.3
pads on no net: D100.1 J1.3 J1.5 J1.6

## Polygon pours and split planes (outlines as drawn)
GND on Bottom Layer "NONET_L-01_P-001" (solid, pour order 0): 43.688,92.075 62.865,92.075 63.5,91.44 63.5,83.566 64.262,82.804 79.248,82.804 80.264,81.788 80.264,24.638 79.502,23.876 26.543,23.876 25.654,24.765 25.654,81.407 27.432,83.185 42.291,83.185 43.053,83.947 43.053,91.44
GND on Top Layer "NONET_L-01_P-001" (solid, pour order 1): 43.688,92.075 43.053,91.44 43.053,83.947 42.037,82.931 26.67,82.931 25.654,81.915 25.654,23.241 26.289,22.606 79.502,22.606 80.264,23.368 80.264,82.169 79.629,82.804 64.262,82.804 63.5,83.566 63.5,91.44 62.865,92.075